# EAGLE board OpenInFusion360ToEdit (EAGLE 9.7.0)
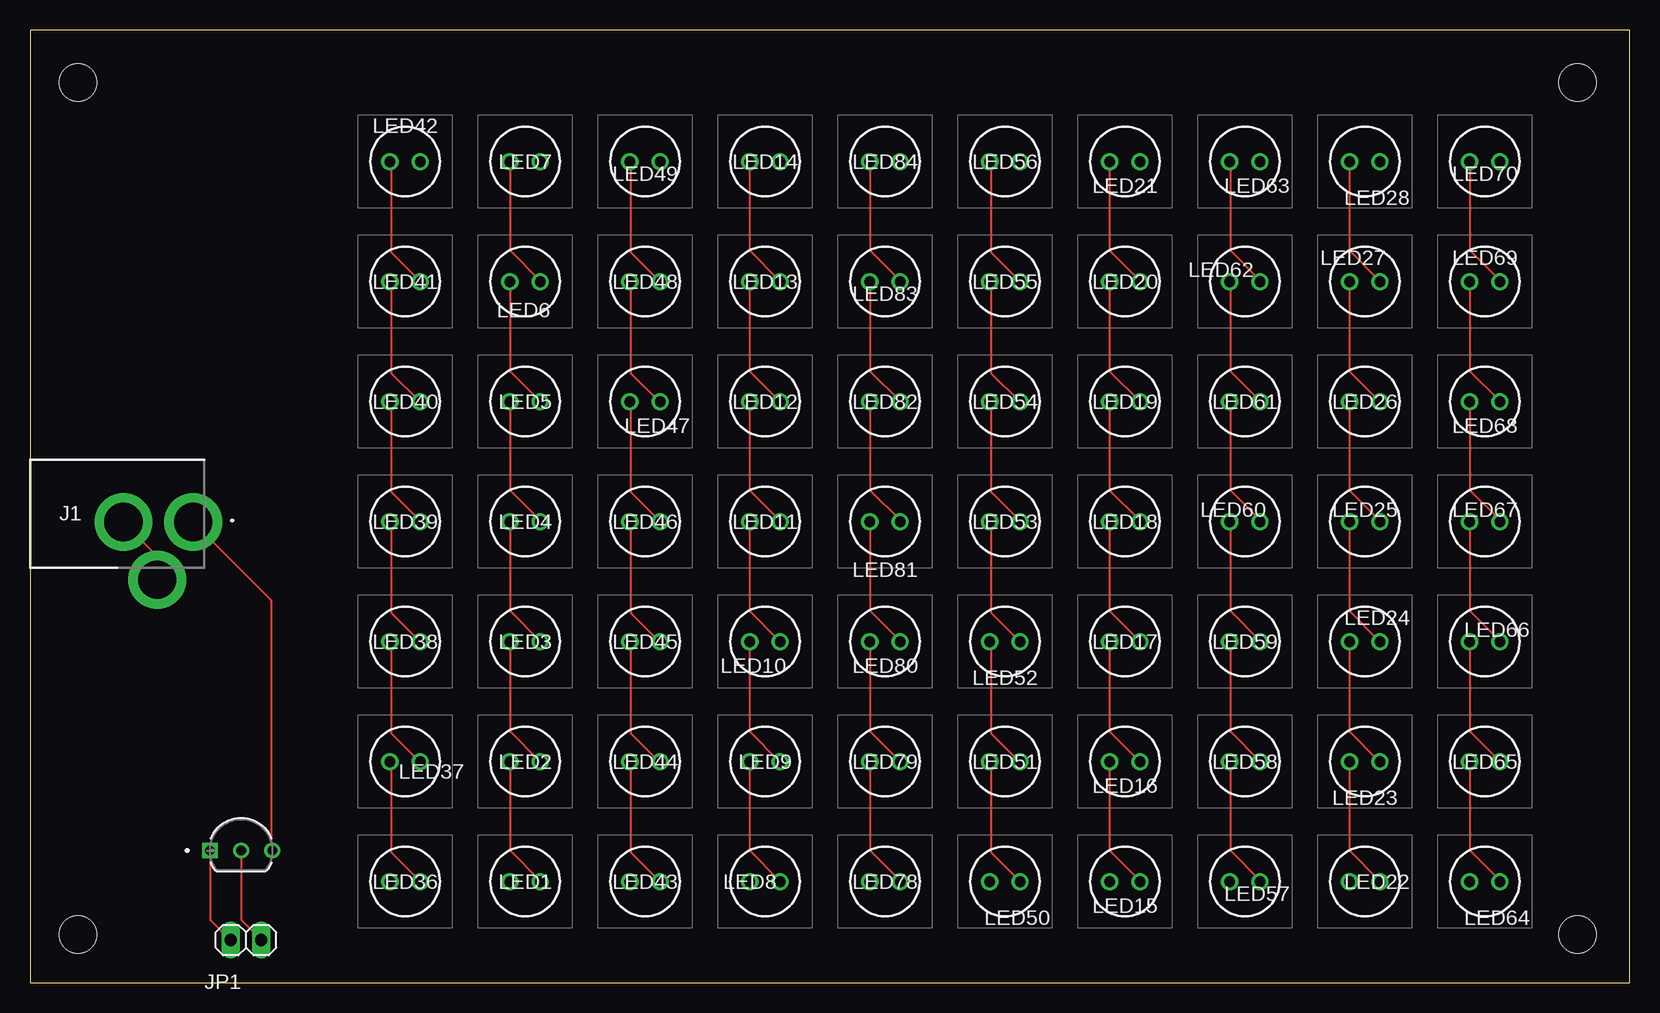
[diagram p0: board, top side]
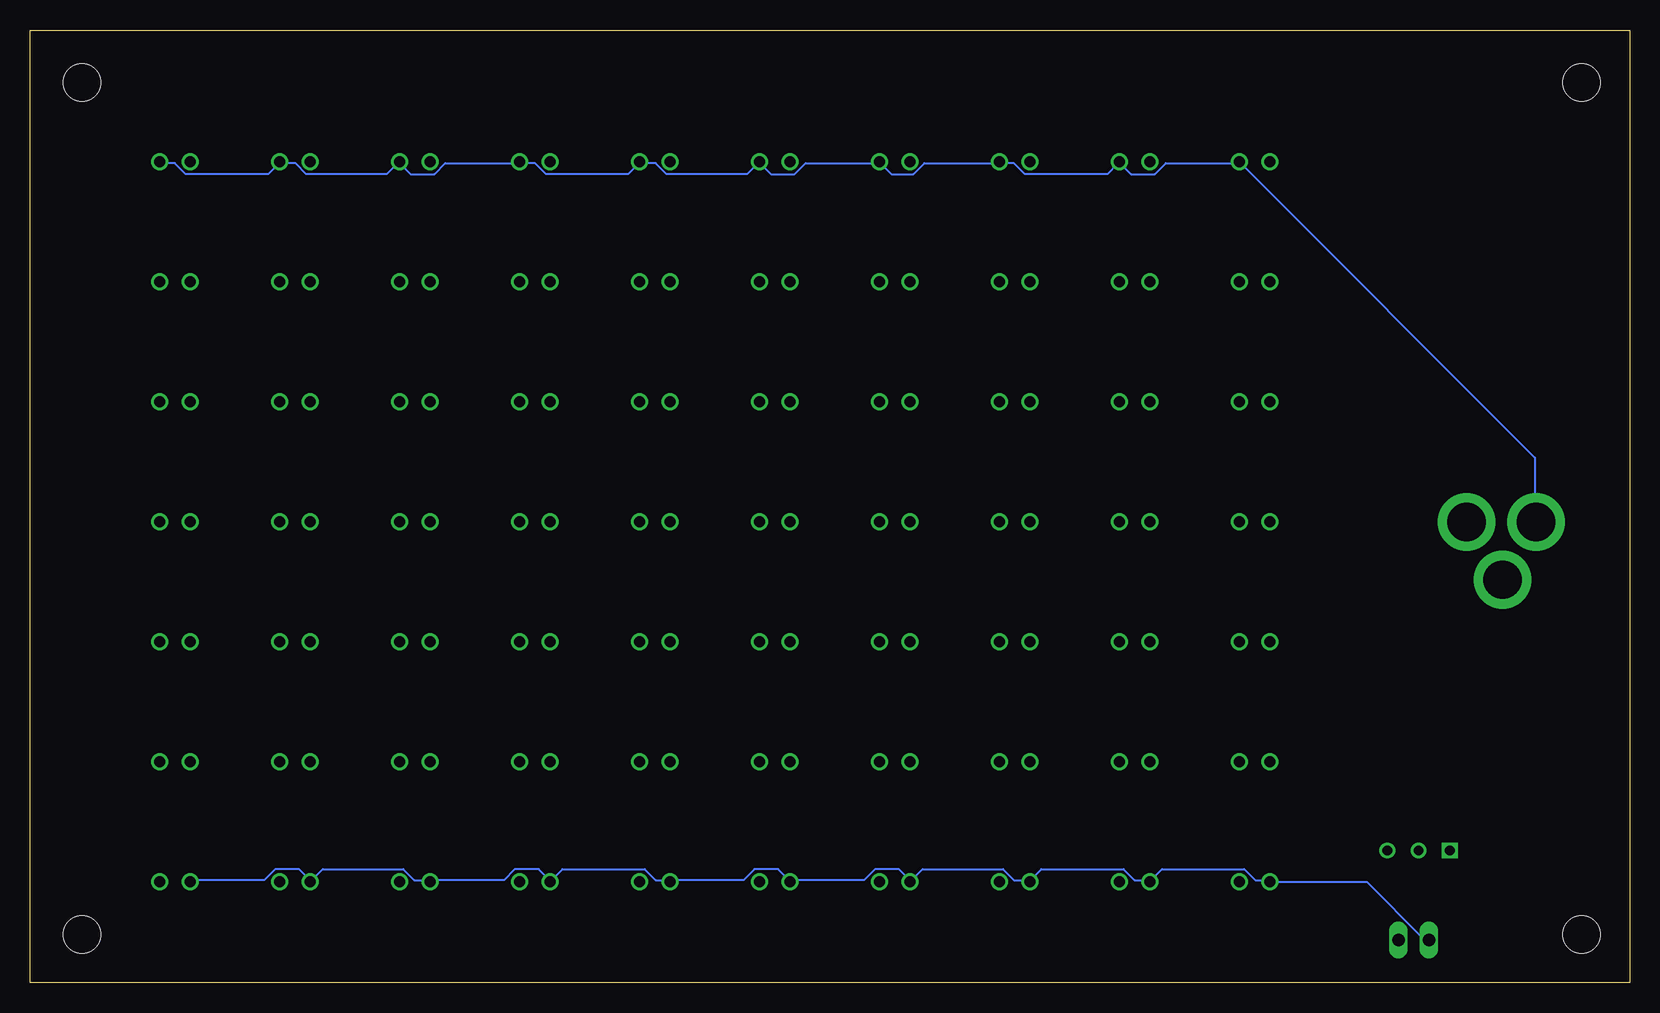
[diagram p1: board, bottom side, seen from below]

Size 133.35 x 79.38 mm. Coordinates in mm from the lower left corner, seen from the top.
Outline: 0,0 133.35,0 133.35,79.38 0,79.38 0,0
Copper layers (1*16): Top / Bottom
Stack-up Default Layer Stack: Top User Defined 0.035mm / Dielectric-1 User Defined 1.5mm / Bottom User Defined 0.035mm
Design rules: minimum copper width 6mil, minimum drill size 0.35mm, copper clearance wire_polygon to wire_polygon 6mil, copper clearance wire_polygon to pad_smd 6mil, copper clearance wire_polygon to via 6mil, copper clearance pad_smd to pad_smd 6mil, copper clearance pad_smd to via 6mil, copper clearance via to via 6mil, copper clearance smd to pad (same net) 6mil, copper clearance smd to via (same net) 6mil, copper clearance smd to smd (same net) 6mil, dimension clearance 40mil, via restrict clearance 0mil, restrict clearance 0mil, drill distance 6mil, keepout clearance 0mil
Holes 3.1 mm at 4,75 129,75 4,4 129,4

## Footprints (pad centres in the part's own frame; a part is rotated, then mirrored left to right if it is on the bottom)
694106301002_1 = drill 3.2 pad 4.8: 1 13.6,3.8; 2 7.8,3.8; 3 10.6,-1
1X02 = drill 1.016 long: 1 -1.27,0; 2 1.27,0
C503BGANCB0F0791 = drill 0.91 pad 1.416: 1 0,0; 2 2.54,0
TO-92-3L_5P33X5P2_ONS = drill 0.813 pad 1.321 square: 1 0,0 | drill 0.813 pad 1.321: 2 2.6,0; 3 5.2,0

## Placement (x,y rotation side)
J1  694106301002  [694106301002_1]  0,34.56 0 top
JP1  PINHD-1X2  [1X02]  18,3.54 180 top
LED1  C503B-GAN-CB0F0791  [C503BGANCB0F0791]  40,8.41 0 top
LED2  C503B-GAN-CB0F0791  [C503BGANCB0F0791]  40,18.41 0 top
LED3  C503B-GAN-CB0F0791  [C503BGANCB0F0791]  40,28.41 0 top
LED4  C503B-GAN-CB0F0791  [C503BGANCB0F0791]  40,38.41 0 top
LED5  C503B-GAN-CB0F0791  [C503BGANCB0F0791]  40,48.41 0 top
LED6  C503B-GAN-CB0F0791  [C503BGANCB0F0791]  40,58.41 0 top
LED7  C503B-GAN-CB0F0791  [C503BGANCB0F0791]  40,68.41 0 top
LED8  C503B-GAN-CB0F0791  [C503BGANCB0F0791]  60,8.41 0 top
LED9  C503B-GAN-CB0F0791  [C503BGANCB0F0791]  60,18.41 0 top
LED10  C503B-GAN-CB0F0791  [C503BGANCB0F0791]  60,28.41 0 top
LED11  C503B-GAN-CB0F0791  [C503BGANCB0F0791]  60,38.41 0 top
LED12  C503B-GAN-CB0F0791  [C503BGANCB0F0791]  60,48.41 0 top
LED13  C503B-GAN-CB0F0791  [C503BGANCB0F0791]  60,58.41 0 top
LED14  C503B-GAN-CB0F0791  [C503BGANCB0F0791]  60,68.41 0 top
LED15  C503B-GAN-CB0F0791  [C503BGANCB0F0791]  90,8.41 0 top
LED16  C503B-GAN-CB0F0791  [C503BGANCB0F0791]  90,18.41 0 top
LED17  C503B-GAN-CB0F0791  [C503BGANCB0F0791]  90,28.41 0 top
LED18  C503B-GAN-CB0F0791  [C503BGANCB0F0791]  90,38.41 0 top
LED19  C503B-GAN-CB0F0791  [C503BGANCB0F0791]  90,48.41 0 top
LED20  C503B-GAN-CB0F0791  [C503BGANCB0F0791]  90,58.41 0 top
LED21  C503B-GAN-CB0F0791  [C503BGANCB0F0791]  90,68.41 0 top
LED22  C503B-GAN-CB0F0791  [C503BGANCB0F0791]  110,8.41 0 top
LED23  C503B-GAN-CB0F0791  [C503BGANCB0F0791]  110,18.41 0 top
LED24  C503B-GAN-CB0F0791  [C503BGANCB0F0791]  110,28.41 0 top
LED25  C503B-GAN-CB0F0791  [C503BGANCB0F0791]  110,38.41 0 top
LED26  C503B-GAN-CB0F0791  [C503BGANCB0F0791]  110,48.41 0 top
LED27  C503B-GAN-CB0F0791  [C503BGANCB0F0791]  110,58.41 0 top
LED28  C503B-GAN-CB0F0791  [C503BGANCB0F0791]  110,68.41 0 top
LED36  C503B-GAN-CB0F0791  [C503BGANCB0F0791]  30,8.41 0 top
LED37  C503B-GAN-CB0F0791  [C503BGANCB0F0791]  30,18.41 0 top
LED38  C503B-GAN-CB0F0791  [C503BGANCB0F0791]  30,28.41 0 top
LED39  C503B-GAN-CB0F0791  [C503BGANCB0F0791]  30,38.41 0 top
LED40  C503B-GAN-CB0F0791  [C503BGANCB0F0791]  30,48.41 0 top
LED41  C503B-GAN-CB0F0791  [C503BGANCB0F0791]  30,58.41 0 top
LED42  C503B-GAN-CB0F0791  [C503BGANCB0F0791]  30,68.41 0 top
LED43  C503B-GAN-CB0F0791  [C503BGANCB0F0791]  50,8.41 0 top
LED44  C503B-GAN-CB0F0791  [C503BGANCB0F0791]  50,18.41 0 top
LED45  C503B-GAN-CB0F0791  [C503BGANCB0F0791]  50,28.41 0 top
LED46  C503B-GAN-CB0F0791  [C503BGANCB0F0791]  50,38.41 0 top
LED47  C503B-GAN-CB0F0791  [C503BGANCB0F0791]  50,48.41 0 top
LED48  C503B-GAN-CB0F0791  [C503BGANCB0F0791]  50,58.41 0 top
LED49  C503B-GAN-CB0F0791  [C503BGANCB0F0791]  50,68.41 0 top
LED50  C503B-GAN-CB0F0791  [C503BGANCB0F0791]  80,8.41 0 top
LED51  C503B-GAN-CB0F0791  [C503BGANCB0F0791]  80,18.41 0 top
LED52  C503B-GAN-CB0F0791  [C503BGANCB0F0791]  80,28.41 0 top
LED53  C503B-GAN-CB0F0791  [C503BGANCB0F0791]  80,38.41 0 top
LED54  C503B-GAN-CB0F0791  [C503BGANCB0F0791]  80,48.41 0 top
LED55  C503B-GAN-CB0F0791  [C503BGANCB0F0791]  80,58.41 0 top
LED56  C503B-GAN-CB0F0791  [C503BGANCB0F0791]  80,68.41 0 top
LED57  C503B-GAN-CB0F0791  [C503BGANCB0F0791]  100,8.41 0 top
LED58  C503B-GAN-CB0F0791  [C503BGANCB0F0791]  100,18.41 0 top
LED59  C503B-GAN-CB0F0791  [C503BGANCB0F0791]  100,28.41 0 top
LED60  C503B-GAN-CB0F0791  [C503BGANCB0F0791]  100,38.41 0 top
LED61  C503B-GAN-CB0F0791  [C503BGANCB0F0791]  100,48.41 0 top
LED62  C503B-GAN-CB0F0791  [C503BGANCB0F0791]  100,58.41 0 top
LED63  C503B-GAN-CB0F0791  [C503BGANCB0F0791]  100,68.41 0 top
LED64  C503B-GAN-CB0F0791  [C503BGANCB0F0791]  120,8.41 0 top
LED65  C503B-GAN-CB0F0791  [C503BGANCB0F0791]  120,18.41 0 top
LED66  C503B-GAN-CB0F0791  [C503BGANCB0F0791]  120,28.41 0 top
LED67  C503B-GAN-CB0F0791  [C503BGANCB0F0791]  120,38.41 0 top
LED68  C503B-GAN-CB0F0791  [C503BGANCB0F0791]  120,48.41 0 top
LED69  C503B-GAN-CB0F0791  [C503BGANCB0F0791]  120,58.41 0 top
LED70  C503B-GAN-CB0F0791  [C503BGANCB0F0791]  120,68.41 0 top
LED78  C503B-GAN-CB0F0791  [C503BGANCB0F0791]  70,8.41 0 top
LED79  C503B-GAN-CB0F0791  [C503BGANCB0F0791]  70,18.41 0 top
LED80  C503B-GAN-CB0F0791  [C503BGANCB0F0791]  70,28.41 0 top
LED81  C503B-GAN-CB0F0791  [C503BGANCB0F0791]  70,38.41 0 top
LED82  C503B-GAN-CB0F0791  [C503BGANCB0F0791]  70,48.41 0 top
LED83  C503B-GAN-CB0F0791  [C503BGANCB0F0791]  70,58.41 0 top
LED84  C503B-GAN-CB0F0791  [C503BGANCB0F0791]  70,68.41 0 top
U1  2N7000BUTO-92-3L_5P33X5P2_ONS  [TO-92-3L_5P33X5P2_ONS]  15,11 0 top

## Library data of the parts
J1 = 694106301002; DESCRIPTION: WURTH ELEKTRONIK - 694106301002 - CONNECTOR, POWER ENTRY, JACK, 3A, 20VDC; HEIGHT: mm; MANUFACTURER_NAME: Wurth Elektronik; MANUFACTURER_PART_NUMBER: 694106301002; MOUSER_PART_NUMBER: 710-694106301002; MOUSER_PRICE-STOCK: https://www.mouser.co.uk/ProductDetail/Wurth-Elektronik/694106301002?qs=a9WhcLg8qCwOEkcI62k5mA%3D%3D
JP1 = Connector; CATEGORY: Headers; DESCRIPTION: Header, Straight, 2 Position; MANUFACTURER: Generic; MPN: Generic; OPERATING_TEMPERATURE: Generic; PART_STATUS: Active; PITCH: 0.100" (2.54mm); ROHS_COMPLIANCE: Generic; SERIES: Generic; SUB-CATEGORY: Headers, Male Pins; TYPE: Board to Board or Cable, Unshrouded, Through Hole, Straight
LED1-LED28 LED36-LED70 LED78-LED84 = C503B-GAN-CB0F0791_IfXYYg; DESCRIPTION: Standard LEDs - Through Hole Green Round LED; HEIGHT: 10.55mm; MANUFACTURER_NAME: CREE LED; MANUFACTURER_PART_NUMBER: C503B-GAN-CB0F0791; MOUSER_PART_NUMBER: 941-C503BGANCB0F0791; MOUSER_PRICE-STOCK: https://www.mouser.co.uk/ProductDetail/Cree-LED/C503B-GAN-CB0F0791?qs=UHyCXFkX5Ey%252ByHW9bNI8Ew%3D%3D
U1 = 2023-10-16_13-13-24_Library; COPYRIGHT: Copyright (C) 2023 Ultra Librarian. All rights reserved.; MANUFACTURER_PART_NUMBER: 2N7000BU; MFR_NAME: onsemi

## Nets
GND: J1.2 J1.3 LED7.2 LED14.2 LED21.2 LED28.2 LED42.2 LED49.2 LED56.2 LED63.2 LED70.2 LED84.2
N$1: LED83.2 LED84.1
N$2: LED82.2 LED83.1
N$3: LED81.2 LED82.1
N$4: LED80.2 LED81.1
N$5: LED79.2 LED80.1
N$6: LED78.2 LED79.1
N$7: LED1.2 LED2.1
N$8: LED2.2 LED3.1
N$9: LED3.2 LED4.1
N$10: LED4.2 LED5.1
N$11: LED5.2 LED6.1
N$12: LED6.2 LED7.1
N$13: LED13.2 LED14.1
N$14: LED12.2 LED13.1
N$15: LED11.2 LED12.1
N$16: LED10.2 LED11.1
N$17: LED9.2 LED10.1
N$18: LED8.2 LED9.1
N$19: LED15.2 LED16.1
N$20: LED16.2 LED17.1
N$21: LED17.2 LED18.1
N$22: LED18.2 LED19.1
N$23: LED19.2 LED20.1
N$24: LED20.2 LED21.1
N$25: LED22.2 LED23.1
N$26: LED23.2 LED24.1
N$27: LED24.2 LED25.1
N$28: LED25.2 LED26.1
N$29: LED26.2 LED27.1
N$30: LED27.2 LED28.1
N$31: JP1.2 LED1.1 LED8.1 LED15.1 LED22.1 LED36.1 LED43.1 LED50.1 LED57.1 LED64.1 LED78.1 U1.1
N$32: JP1.1 U1.2
N$37: LED36.2 LED37.1
N$38: LED37.2 LED38.1
N$39: LED38.2 LED39.1
N$40: LED39.2 LED40.1
N$41: LED40.2 LED41.1
N$42: LED41.2 LED42.1
N$43: LED43.2 LED44.1
N$44: LED44.2 LED45.1
N$45: LED45.2 LED46.1
N$46: LED46.2 LED47.1
N$47: LED47.2 LED48.1
N$48: LED48.2 LED49.1
N$49: LED50.2 LED51.1
N$50: LED51.2 LED52.1
N$51: LED52.2 LED53.1
N$52: LED53.2 LED54.1
N$53: LED54.2 LED55.1
N$54: LED55.2 LED56.1
N$55: LED57.2 LED58.1
N$56: LED58.2 LED59.1
N$57: LED59.2 LED60.1
N$58: LED60.2 LED61.1
N$59: LED61.2 LED62.1
N$60: LED62.2 LED63.1
N$61: LED64.2 LED65.1
N$62: LED65.2 LED66.1
N$63: LED66.2 LED67.1
N$64: LED67.2 LED68.1
N$65: LED68.2 LED69.1
N$66: LED69.2 LED70.1
VDRIVER: J1.1 U1.3

## Tracks (layer width: path | path; a pad name or v marks a point on that pad's centre or on a via)
GND
  Top 0.152: J1.3 10.49,33.68 10.49,35.66 7.9,38.25 J1.2
  Bottom 0.152: LED70.2 122.5,68.28 121.28,68.28 120.37,67.36 113.51,67.36 112.59,68.28 LED28.2 112.44,68.28 111.22,68.28 110.31,67.36 103.6,67.36 102.69,68.28 LED63.2 102.54,68.28 101.62,67.36 99.64,67.36 98.73,68.28 92.63,68.28 LED21.2 92.48,68.28 91.26,68.28 90.34,67.36 83.49,67.36 82.57,68.28 LED56.2 82.42,68.28 81.2,68.28 80.29,67.36 73.58,67.36 72.67,68.28 LED84.2 72.51,68.28 71.6,67.36 69.62,67.36 68.7,68.28 62.61,68.28 LED14.2 62.45,68.28 61.54,67.36 59.71,67.36 58.8,68.28 52.55,68.28 LED49.2 52.4,68.28 51.33,68.28 50.41,67.36 43.56,67.36 42.64,68.28 LED7.2 42.49,68.28 41.58,67.36 39.59,67.36 38.68,68.28 32.58,68.28 LED42.2 32.43,68.28 7.9,43.74 7.9,38.41 J1.2
N$1
  Top 0.152: LED84.1 70.08,68.28 70.08,60.96 72.51,58.52 LED83.2
N$2
  Top 0.152: LED83.1 70.08,58.37 70.08,50.9 72.51,48.46 LED82.2
N$3
  Top 0.152: LED82.1 70.08,48.31 70.08,41 72.51,38.56 LED81.2
N$4
  Top 0.152: LED81.1 70.08,38.41 70.08,30.94 72.51,28.5 LED80.2
N$5
  Top 0.152: LED80.1 70.08,28.35 70.08,20.88 72.51,18.44 LED79.2
N$6
  Top 0.152: LED79.1 70.08,18.29 70.08,10.97 72.51,8.53 LED78.2
N$7
  Top 0.152: LED2.1 40.05,18.29 40.05,10.97 42.49,8.53 LED1.2
N$8
  Top 0.152: LED3.1 40.05,28.35 40.05,20.88 42.49,18.44 LED2.2
N$9
  Top 0.152: LED4.1 40.05,38.41 40.05,30.94 42.49,28.5 LED3.2
N$10
  Top 0.152: LED5.1 40.05,48.31 40.05,41 42.49,38.56 LED4.2
N$11
  Top 0.152: LED6.1 40.05,58.37 40.05,50.9 42.49,48.46 LED5.2
N$12
  Top 0.152: LED7.1 40.05,68.28 40.05,60.96 42.49,58.52 LED6.2
N$13
  Top 0.152: LED14.1 60.02,68.28 60.02,60.96 62.45,58.52 LED13.2
N$14
  Top 0.152: LED13.1 60.02,58.37 60.02,50.9 62.45,48.46 LED12.2
N$15
  Top 0.152: LED12.1 60.02,48.31 60.02,41 62.45,38.56 LED11.2
N$16
  Top 0.152: LED11.1 60.02,38.41 60.02,30.94 62.45,28.5 LED10.2
N$17
  Top 0.152: LED10.1 60.02,28.35 60.02,20.88 62.45,18.44 LED9.2
N$18
  Top 0.152: LED9.1 60.02,18.29 60.02,10.97 62.45,8.53 LED8.2
N$19
  Top 0.152: LED16.1 90.04,18.29 90.04,10.97 92.48,8.53 LED15.2
N$20
  Top 0.152: LED17.1 90.04,28.35 90.04,20.88 92.48,18.44 LED16.2
N$21
  Top 0.152: LED18.1 90.04,38.41 90.04,30.94 92.48,28.5 LED17.2
N$22
  Top 0.152: LED19.1 90.04,48.31 90.04,41 92.48,38.56 LED18.2
N$23
  Top 0.152: LED20.1 90.04,58.37 90.04,50.9 92.48,48.46 LED19.2
N$24
  Top 0.152: LED21.1 90.04,68.28 90.04,60.96 92.48,58.52 LED20.2
N$25
  Top 0.152: LED23.1 110,18.29 110,10.97 112.44,8.53 LED22.2
N$26
  Top 0.152: LED24.1 110,28.35 110,20.88 112.44,18.44 LED23.2
N$27
  Top 0.152: LED25.1 110,30.94 112.44,28.5 LED24.2
N$28
  Top 0.152: LED26.1 110,48.31 110,41 112.44,38.56 LED25.2
N$29
  Top 0.152: LED27.1 110,58.37 110,50.9 112.44,48.46 LED26.2
N$30
  Top 0.152: LED28.1 110,68.28 110,60.96 112.44,58.52 LED27.2
N$31
  Top 0.152: U1.1 15.06,10.97 15.06,5.18 16.58,3.66 JP1.2
  Bottom 0.152: JP1.2 16.73,3.66 17.19,3.66 21.92,8.38 29.99,8.38 LED36.1 30.15,8.53 31.21,8.53 32.13,9.45 38.98,9.45 39.9,8.53 LED1.1 40.05,8.53 41.27,8.53 42.19,9.45 49.04,9.45 49.96,8.53 LED43.1 50.11,8.53 51.33,8.53 52.24,9.45 58.95,9.45 59.86,8.53 LED8.1 60.02,8.53 60.93,9.45 62.91,9.45 63.83,8.53 69.92,8.53 LED78.1 70.08,8.53 70.99,9.45 72.97,9.45 73.89,8.53 79.98,8.53 LED50.1 80.13,8.53 81.2,8.53 82.11,9.45 88.97,9.45 89.89,8.53 LED15.1 90.04,8.53 90.95,9.45 92.94,9.45 93.85,8.53 99.94,8.53 LED57.1 100.1,8.53 101.32,8.53 102.23,9.45 108.94,9.45 109.85,8.53 LED22.1 110,8.53 110.92,9.45 112.9,9.45 113.81,8.53 119.91,8.53 LED64.1
N$32
  Top 0.152: U1.2 17.65,10.97 17.65,5.18 19.17,3.66 JP1.1
N$37
  Top 0.152: LED37.1 30.15,18.29 30.15,10.82 32.43,8.53 LED36.2
N$38
  Top 0.152: LED38.1 30.15,28.35 30.15,20.73 32.43,18.44 LED37.2
N$39
  Top 0.152: LED39.1 30.15,38.41 30.15,30.79 32.43,28.5 LED38.2
N$40
  Top 0.152: LED40.1 30.15,48.31 30.15,40.84 32.43,38.56 LED39.2
N$41
  Top 0.152: LED41.1 30.15,58.37 30.15,50.75 32.43,48.46 LED40.2
N$42
  Top 0.152: LED42.1 30.15,68.28 30.15,60.81 32.43,58.52 LED41.2
N$43
  Top 0.152: LED44.1 50.11,18.29 50.11,10.82 52.4,8.53 LED43.2
N$44
  Top 0.152: LED45.1 50.11,28.35 50.11,20.73 52.4,18.44 LED44.2
N$45
  Top 0.152: LED46.1 50.11,38.41 50.11,30.79 52.4,28.5 LED45.2
N$46
  Top 0.152: LED47.1 50.11,48.31 50.11,40.84 52.4,38.56 LED46.2
N$47
  Top 0.152: LED48.1 50.11,58.37 50.11,50.75 52.4,48.46 LED47.2
N$48
  Top 0.152: LED49.1 50.11,68.28 50.11,60.81 52.4,58.52 LED48.2
N$49
  Top 0.152: LED51.1 80.13,18.29 80.13,10.82 82.42,8.53 LED50.2
N$50
  Top 0.152: LED52.1 80.13,28.35 80.13,20.73 82.42,18.44 LED51.2
N$51
  Top 0.152: LED53.1 80.13,38.41 80.13,30.79 82.42,28.5 LED52.2
N$52
  Top 0.152: LED54.1 80.13,48.31 80.13,40.84 82.42,38.56 LED53.2
N$53
  Top 0.152: LED55.1 80.13,58.37 80.13,50.75 82.42,48.46 LED54.2
N$54
  Top 0.152: LED56.1 80.13,68.28 80.13,60.81 82.42,58.52 LED55.2
N$55
  Top 0.152: LED58.1 100.1,18.29 100.1,10.97 102.54,8.53 LED57.2
N$56
  Top 0.152: LED59.1 100.1,28.35 100.1,20.88 102.54,18.44 LED58.2
N$57
  Top 0.152: LED60.1 100.1,38.41 100.1,30.94 102.54,28.5 LED59.2
N$58
  Top 0.152: LED61.1 100.1,48.31 100.1,41 102.54,38.56 LED60.2
N$59
  Top 0.152: LED62.1 100.1,58.37 100.1,50.9 102.54,48.46 LED61.2
N$60
  Top 0.152: LED63.1 100.1,68.28 100.1,60.96 102.54,58.52 LED62.2
N$61
  Top 0.152: LED65.1 120.06,18.29 120.06,10.97 122.5,8.53 LED64.2
N$62
  Top 0.152: LED66.1 120.06,28.35 120.06,20.88 122.5,18.44 LED65.2
N$63
  Top 0.152: LED67.1 120.06,38.41 120.06,30.94 122.5,28.5 LED66.2
N$64
  Top 0.152: LED68.1 120.06,48.31 120.06,41 122.5,38.56 LED67.2
N$65
  Top 0.152: LED69.1 120.06,58.37 120.06,50.9 122.5,48.46 LED68.2
N$66
  Top 0.152: LED70.1 120.06,68.28 120.06,60.96 122.5,58.52 LED69.2
VDRIVER
  Top 0.152: U1.3 20.09,11.12 20.09,31.85 13.69,38.25 J1.1